# EAGLE board Enclosure.Front.NusbioPlus (EAGLE 7.6.0)

Size 60 x 22.7 mm. Coordinates in mm from the lower left corner, seen from the top.
Outline: 0,0 60,0 60,22.7 0,22.7 0,0
Copper layers (1*16): Top 0.035mm / dielectric 1.5mm / Bottom 0.035mm
Design rules "default": minimum track width 10mil, minimum drill 24mil, track to track 8mil, track to pad 8mil, pad to pad 8mil, via to via 8mil, smd to smd 8mil, copper to edge 40mil, drill to drill 8mil, minimum pad ring 10mil, minimum via ring 8mil, stop-mask expansion 4mil, vias tented up to drill 0mil, thermal gap 10mil

## Footprints (pad centres in the part's own frame; a part is rotated, then mirrored left to right if it is on the bottom)
1X10-BIG = drill 1.016 pad 1.778 octagon: 1 -11.43,0; 2 -8.89,0; 3 -6.35,0; 4 -3.81,0; 5 -1.27,0; 6 1.27,0; 7 3.81,0; 8 6.35,0; 9 8.89,0; 10 11.43,0
SO18W = smd 0.6 x 2.2: 1 -4.445,-4.6; 2 -3.175,-4.6; 3 -1.905,-4.6; 4 -0.635,-4.6; 5 0.635,-4.6; 6 1.905,-4.6; 7 3.175,-4.6; 8 4.445,-4.6; 9 5.715,-4.6; 10 5.775,4.6; 11 4.505,4.6; 12 3.235,4.6; 13 1.965,4.6; 14 0.695,4.6; 15 -0.575,4.6; 16 -1.845,4.6; 17 -3.145,4.6; 18 -4.445,4.6
1206 = smd 1.6 x 1.803: A -1.422,0; C 1.422,0
R1206 = smd 1.6 x 1.803: 1 -1.422,0; 2 1.422,0
SO16 = smd 0.6 x 2.2: 1 -4.445,-2.6; 2 -3.175,-2.6; 3 -1.905,-2.6; 4 -0.635,-2.6; 5 0.635,-2.6; 6 1.905,-2.6; 7 3.175,-2.6; 8 4.445,-2.6; 9 4.445,2.6; 10 3.175,2.6; 11 1.905,2.6; 12 0.635,2.6; 13 -0.635,2.6; 14 -1.905,2.6; 15 -3.175,2.6; 16 -4.445,2.6

## Placement (x,y rotation side)
ADC_HEADER  PINHD-1X10  [1X10-BIG]  45.5,17 0 top
GPIO_HEADER  PINHD-1X10  [1X10-BIG]  14.5,17 0 top
IC1  MCP23008/SO  [SO18W]  8,9 0 bottom
NUSBIO_IN  PINHD-1X10  [1X10-BIG]  30,9.87 0 top
NUSBIO_IN1  PINHD-1X10  [1X10-BIG]  30,2.7 0 top
POWER  [1206]  52,9.5 180 top
R_PU_SCL  [R1206]  15,4.5 90 bottom
R_PU_SDA  [R1206]  15,11 90 bottom
R_PWR_2K  [R1206]  51.5,3 180 bottom
U$1  MCP3008SL  [SO16]  52,10 180 bottom

## Library data of the parts
ADC_HEADER GPIO_HEADER IC1 NUSBIO_IN NUSBIO_IN1 POWER R_PU_SCL R_PU_SDA R_PWR_2K = adafruit
U$1 = MCP3008

## Nets
ADC_0: ADC_HEADER.1 U$1.1
ADC_1: ADC_HEADER.2 U$1.2
ADC_2: ADC_HEADER.3 U$1.3
ADC_3: ADC_HEADER.4 U$1.4
ADC_4: ADC_HEADER.5 U$1.5
ADC_5: ADC_HEADER.6 U$1.6
ADC_6: ADC_HEADER.7 U$1.7
ADC_7: ADC_HEADER.8 U$1.8
GND: ADC_HEADER.9 ADC_HEADER.10 IC1.3 IC1.4 IC1.5 IC1.9 NUSBIO_IN1.8 NUSBIO_IN1.9 NUSBIO_IN1.10 NUSBIO_IN.10 R_PWR_2K.1 U$1.9 U$1.14
GPIO_0_I2C_SCL: IC1.1 NUSBIO_IN1.1 NUSBIO_IN.1 R_PU_SCL.1
GPIO_1_I2C_SDA: IC1.2 NUSBIO_IN1.2 NUSBIO_IN.2 R_PU_SDA.1
GPIO_2: GPIO_HEADER.9 NUSBIO_IN.3
GPIO_3: GPIO_HEADER.10 NUSBIO_IN.4
GPIO_4_SPI_SCK: NUSBIO_IN1.3 NUSBIO_IN.5 U$1.13
GPIO_5_SPI_MOSI: NUSBIO_IN1.4 NUSBIO_IN.6 U$1.11
GPIO_6_SPI_MISO: NUSBIO_IN1.5 NUSBIO_IN.7 U$1.12
GPIO_7_SPI_CS_ADC: NUSBIO_IN.8 U$1.10
GPIO_8: GPIO_HEADER.1 IC1.10
GPIO_9: GPIO_HEADER.2 IC1.11
GPIO_10: GPIO_HEADER.3 IC1.12
GPIO_11: GPIO_HEADER.4 IC1.13
GPIO_12: GPIO_HEADER.5 IC1.14
GPIO_13: GPIO_HEADER.6 IC1.15
GPIO_14: GPIO_HEADER.7 IC1.16
GPIO_15: GPIO_HEADER.8 IC1.17
N$1: POWER.C R_PWR_2K.2
VCC: IC1.6 IC1.18 NUSBIO_IN1.6 NUSBIO_IN1.7 NUSBIO_IN.9 POWER.A R_PU_SCL.2 R_PU_SDA.2 U$1.15 U$1.16

## Tracks (layer width: path | path; a pad name or v marks a point on that pad's centre or on a via)
ADC_0  (1 unrouted)
ADC_1  (1 unrouted)
ADC_2  (1 unrouted)
ADC_3  (1 unrouted)
ADC_4  (1 unrouted)
ADC_5  (1 unrouted)
ADC_6  (1 unrouted)
ADC_7  (1 unrouted)
GND  (12 unrouted)
GPIO_0_I2C_SCL  (3 unrouted)
GPIO_1_I2C_SDA  (3 unrouted)
GPIO_2  (1 unrouted)
GPIO_3  (1 unrouted)
GPIO_4_SPI_SCK  (2 unrouted)
GPIO_5_SPI_MOSI  (2 unrouted)
GPIO_6_SPI_MISO  (2 unrouted)
GPIO_7_SPI_CS_ADC  (1 unrouted)
GPIO_8  (1 unrouted)
GPIO_9  (1 unrouted)
GPIO_10  (1 unrouted)
GPIO_11  (1 unrouted)
GPIO_12  (1 unrouted)
GPIO_13  (1 unrouted)
GPIO_14  (1 unrouted)
GPIO_15  (1 unrouted)
N$1  (1 unrouted)
VCC  (9 unrouted)

## Text on the board
tNames: 8 | 9 | 10 | 11 | 12 | 13 | 14 | 15 | 2 | 3 | GND | GND | 0 | 1 | 2 | 3 | 5 | 6 | 7 | 4 | GPIO | ADC | Nusbio / + | I2C | SPI | SCL | SDA | CLK | MOSI | MISO | VCC | VCC | GND | GND | GND | GPIO | 2 | 3
bNames: ADC0 | GPIO0